# EAGLE board roland_121_vcf (EAGLE 7.1.0)

Size 100 x 80 mm. Coordinates in mm from the lower left corner, seen from the top.
Outline: 0,0 100,0 100,80 0,80 0,0
Copper layers (1*16): Top 0.035mm / dielectric 1.5mm / Bottom 0.035mm
Design rules "default *": minimum track width 24mil, minimum drill 24mil, track to track 14mil, track to pad 14mil, pad to pad 14mil, via to via 14mil, smd to smd 8mil, copper to edge 0mil, drill to drill 8mil, minimum pad ring 10mil, minimum via ring 8mil, stop-mask expansion 4mil, vias tented up to drill 0mil, thermal gap 10mil

## Footprints (pad centres in the part's own frame; a part is rotated, then mirrored left to right if it is on the bottom)
LSP10 = drill 1.016 pad 2.159 octagon: MP 0,0
B45181A = drill 0.813 pad 1.6: + -1.27,0 | drill 0.813 pad 1.6 octagon: - 1.27,0
C025-030X050 = drill 0.813 octagon: 1 -1.27,0; 2 1.27,0
3RP/1610N = drill 1.2 pad 2.184: 1 -5,0; 2 0,0; 3 5,0
DO35-7 = drill 0.813 long: A 3.81,0; C -3.81,0
RTRIM64W = drill 0.61: 1 1.27,-2.54; 2 1.27,0; 3 1.27,2.54
DIL08 = drill 0.813 pad 1.27: 1 -3.81,-3.81; 2 -1.27,-3.81; 3 1.27,-3.81; 4 3.81,-3.81; 5 3.81,3.81; 6 1.27,3.81; 7 -1.27,3.81; 8 -3.81,3.81
DIL16 = drill 0.813 long: 1 -8.89,-3.81; 2 -6.35,-3.81; 3 -3.81,-3.81; 4 -1.27,-3.81; 5 1.27,-3.81; 6 3.81,-3.81; 7 6.35,-3.81; 8 8.89,-3.81; 9 8.89,3.81; 10 6.35,3.81; 11 3.81,3.81; 12 1.27,3.81; 13 -1.27,3.81; 14 -3.81,3.81; 15 -6.35,3.81; 16 -8.89,3.81
TO92F = drill 0.813 octagon: 1 -1.27,0; 2 0,1.905; 3 1.27,0
TO92 = drill 0.813 octagon: 1 1.27,0; 2 0,1.905; 3 -1.27,0
0207/7 = drill 0.813 octagon: 1 -3.81,0; 2 3.81,0
POWER_16 = drill 1.016 pad 1.88 octagon: 1 -6.35,-1.27; 2 -6.35,1.27; 3 -3.81,-1.27; 4 -3.81,1.27; 5 -1.27,-1.27; 6 -1.27,1.27; 7 1.27,-1.27; 8 1.27,1.27; 9 3.81,-1.27; 10 3.81,1.27; 11 6.35,-1.27; 12 6.35,1.27; 13 8.89,-1.27; 14 8.89,1.27; 15 11.43,-1.27; 16 11.43,1.27

## Placement (x,y rotation side)
12DB_OUT  LSP10  [LSP10]  68.58,60.96 0 top
24DB_OUT  LSP10  [LSP10]  67.31,66.04 0 top
C1  22uF  [B45181A]  7.62,29.21 90 top
C2  22uF  [B45181A]  7.62,35.56 270 top
C3  0.1uF  [C025-030X050]  21.59,24.13 0 top
C4  0.1uF  [C025-030X050]  19.05,41.91 0 top
C5  0.1uF  [C025-030X050]  55.88,36.83 270 top
C6  0.1uF  [C025-030X050]  74.93,55.88 0 top
C7  0.1uF  [C025-030X050]  52.07,36.83 270 top
C8  0.1uF  [C025-030X050]  82.55,48.26 270 top
C9  470p  [C025-030X050]  33.02,38.1 0 top
C10  470p  [C025-030X050]  54.61,46.99 0 top
C11  22uF  [B45181A]  49.53,68.58 0 top
C12  22uF  [B45181A]  54.61,68.58 180 top
C13  22uF  [B45181A]  78.74,60.96 180 top
C14  22uF  [B45181A]  73.66,60.96 0 top
C15  470p  [C025-030X050]  83.82,43.18 0 top
C16  470p  [C025-030X050]  64.77,35.56 0 top
C17  22uF  [B45181A]  52.07,73.66 180 top
C18  22uF  [B45181A]  46.99,73.66 0 top
C19  22uF  [B45181A]  62.23,60.96 90 top
C20  22uF  [B45181A]  62.23,66.04 270 top
CUTOFF  100k  [3RP/1610N]  74.93,2.54 0 top
CV1  LSP10  [LSP10]  46.99,8.89 0 top
CV1_LEVEL  100k  [3RP/1610N]  41.91,2.54 0 top
CV1_NORM  LSP10  [LSP10]  19.05,53.34 0 top
CV2  LSP10  [LSP10]  63.5,8.89 0 top
CV2_LEVEL  100k  [3RP/1610N]  58.42,2.54 0 top
D1  1N4148DO35-7  [DO35-7]  30.48,67.31 270 top
D2  1N4148DO35-7  [DO35-7]  33.02,67.31 90 top
FREQ_TRIM  100k  [RTRIM64W]  63.5,24.13 180 top
IC1  TL072P  [DIL08]  19.05,33.02 90 top
IC2  LM13700N  [DIL16]  43.18,43.18 270 top
IC3  LM13700N  [DIL16]  74.93,43.18 90 top
IN1  LSP10  [LSP10]  13.97,8.89 0 top
IN1_LEVEL  100k  [3RP/1610N]  8.89,2.54 0 top
IN2  LSP10  [LSP10]  30.48,8.89 0 top
IN2_LEVEL  100k  [3RP/1610N]  25.4,2.54 0 top
Q1  MPF102  [TO92F]  33.02,41.91 0 top
Q2  2N3904  [TO92]  48.26,24.13 180 top
Q3  2N3906  [TO92]  31.75,55.88 0 top
Q4  MPF102  [TO92F]  62.23,49.53 180 top
Q5  2N3904  [TO92]  69.85,72.39 180 top
Q6  MPF102  [TO92F]  54.61,41.91 0 top
Q7  MPF102  [TO92F]  63.5,43.18 270 top
Q8  2N3904  [TO92]  63.5,54.61 270 top
R5  100k  [0207/7]  25.4,10.16 270 top
R8  100k  [0207/7]  8.89,10.16 90 top
R9  150k  [0207/7]  74.93,10.16 270 top
R10  100k  [0207/7]  41.91,10.16 270 top
R11  100k  [0207/7]  58.42,10.16 270 top
R12  1M  [0207/7]  58.42,20.32 90 top
R13  290k  [0207/7]  54.61,20.32 90 top
R14  33k  [0207/7]  30.48,33.02 0 top
R15  10k  [0207/7]  12.7,41.91 90 top
R16  15k  [0207/7]  12.7,31.75 90 top
R17  27k  [0207/7]  30.48,29.21 0 top
R19  33k  [0207/7]  30.48,25.4 180 top
R20  560  [0207/7]  31.75,20.32 180 top
R21  10k  [0207/7]  12.7,17.78 180 top
R22  560  [0207/7]  39.37,26.67 90 top
R23  1k8  [0207/7]  22.86,17.78 180 top
R24  5k6  [0207/7]  12.7,15.24 0 top
R25  10k  [0207/7]  34.29,17.78 180 top
R26  68k  [0207/7]  33.02,45.72 0 top
R27  15k  [0207/7]  33.02,52.07 0 top
R28  1k5  [0207/7]  44.45,19.05 180 top
R29  22k  [0207/7]  25.4,45.72 90 top
R30  100k  [0207/7]  54.61,27.94 0 top
R31  68k  [0207/7]  25.4,55.88 270 top
R32  560  [0207/7]  31.75,59.69 180 top
R33  560  [0207/7]  50.8,50.8 270 top
R34  6k8  [0207/7]  91.44,10.16 270 top
R35  68k  [0207/7]  50.8,59.69 180 top
R36  15k  [0207/7]  43.18,60.96 90 top
R37  10k  [0207/7]  88.9,22.86 180 top
R38  22k  [0207/7]  41.91,71.12 90 top
R39  68k  [0207/7]  31.75,74.93 0 top
R40  560  [0207/7]  43.18,26.67 90 top
R42  100  [0207/7]  86.36,10.16 90 top
R43  560  [0207/7]  86.36,39.37 180 top
R44  470k  [0207/7]  57.15,57.15 90 top
R45  47k  [0207/7]  52.07,63.5 180 top
R46  12k  [0207/7]  83.82,60.96 90 top
R47  4k7  [0207/7]  60.96,73.66 180 top
R48  10k  [0207/7]  96.52,10.16 90 top
R49  68k  [0207/7]  74.93,30.48 0 top
R50  15k  [0207/7]  86.36,34.29 180 top
R51  22k  [0207/7]  68.58,27.94 90 top
R52  68k  [0207/7]  63.5,39.37 180 top
R53  560  [0207/7]  74.93,27.94 180 top
R54  560  [0207/7]  74.93,25.4 180 top
R55  68k  [0207/7]  73.66,17.78 180 top
R56  15k  [0207/7]  86.36,31.75 180 top
R57  22k  [0207/7]  86.36,60.96 270 top
R58  10k  [0207/7]  74.93,20.32 0 top
RESONANCE  100k  [3RP/1610N]  91.44,2.54 0 top
U1  POWER  [POWER_16]  11.43,62.23 270 top
WIDTH  10k  [RTRIM64W]  12.7,22.86 90 top

## Library data of the parts
12DB_OUT 24DB_OUT CV1 CV1_NORM CV2 IN1 IN2 = solpad
C1-C20 FREQ_TRIM R5 R8-R17 R19-R40 R42-R58 WIDTH = rcl
CUTOFF CV1_LEVEL CV2_LEVEL IN1_LEVEL IN2_LEVEL RESONANCE = pot
D1 D2 = diode
IC1 = linear
IC2 IC3 = synthdiy updated imperial
Q1 Q4 Q6 Q7 = mes_transistors
Q2 Q5 Q8 = transistor-npn
Q3 = transistor-pnp
U1 = eurorack

## Nets
+12V: C3.1 C5.1 C7.1 CUTOFF.3 FREQ_TRIM.3 IC1.8 IC2.11 IC3.11 Q1.1 Q2.1 Q4.1 Q6.1 Q7.1 Q8.1 R44.1 R46.1 U1.9 U1.10
-12V: C4.2 C6.2 C8.2 FREQ_TRIM.1 IC1.4 IC2.6 IC3.6 R13.2 R29.1 R30.2 R38.1 R45.2 R47.2 R51.1 R57.1 R58.1 U1.1 U1.2
GND: C3.2 C4.1 C5.2 C6.1 C7.2 C8.1 C9.2 C10.2 C15.2 C16.2 CUTOFF.1 CV1_LEVEL.1 CV2_LEVEL.1 D1.A D2.C IC2.7 IC2.10 IC3.7 IC3.10 IN1_LEVEL.1 IN2_LEVEL.1 Q3.3 R14.2 R15.2 R20.1 R22.1 R28.2 R32.1 R33.1 R37.2 R40.1 R42.2 R43.1 R53.1 R54.1 U1.3 U1.4 U1.5 U1.6 U1.7 U1.8
N$1: IC2.1 R27.2
N$2: IC2.16 R36.2
N$3: IC2.13 R31.1 R32.2 R35.2
N$4: IC2.14 R33.2
N$5: IN2_LEVEL.2 R5.2
N$6: C1.+ R5.1 R8.2
N$7: C2.+ IC1.2 R17.2
N$8: IC1.1 R17.1 R19.2
N$9: R16.1 WIDTH.3
N$10: CV2_LEVEL.2 R11.2
N$11: IC1.3 R14.1
N$12: IC1.5 R15.1
N$13: IC1.7 R21.2 WIDTH.1 WIDTH.2
N$14: IC3.1 R50.2
N$15: IC3.4 R39.1 R40.2 R49.2
N$16: IC1.6 R9.1 R10.1 R11.1 R12.1 R13.1 R16.2
N$17: FREQ_TRIM.2 R12.2
N$18: R23.1 R25.2
N$19: R21.1 R23.2 R24.2
N$20: Q2.2 R24.1 R25.1 R28.1
N$21: Q2.3 Q3.2 R30.1
N$22: IC2.4 R19.1 R20.2 R26.2
N$23: IC2.3 R22.2 R34.1
N$24: IC3.3 R43.2
N$25: IC3.16 R56.2
N$26: IC3.13 R52.1 R53.2 R55.2
N$27: IC3.14 R54.2
N$28: Q1.2 R26.1 R29.2 R31.2
N$29: 24DB_OUT.MP C20.+
N$30: 12DB_OUT.MP C14.+
N$31: Q5.3 R47.1
N$32: C13.+ Q5.1 R46.2
N$33: C12.+ Q5.2 R44.2 R45.1
N$34: IN2.MP IN2_LEVEL.3
N$36: C19.- C20.-
N$37: C13.- C14.-
N$38: C11.- C12.-
N$39: C1.- C2.-
N$40: C9.1 IC2.5 Q1.3
N$41: C10.1 IC2.12 Q4.3
N$42: C15.1 IC3.5 Q6.3
N$43: C16.1 IC3.12 Q7.3
N$44: Q6.2 R49.1 R51.2 R52.2
N$45: Q3.1 R27.1 R36.1 R50.1 R56.1
N$46: C11.+ Q4.2 R35.1 R38.2 R39.2
N$47: Q7.2 Q8.2 R57.2
N$48: R42.1 RESONANCE.1
N$49: C17.- C18.-
N$50: C18.+ R48.2
N$51: R48.1 RESONANCE.3
N$52: D1.C D2.A R34.2 R37.1 RESONANCE.2
N$53: CV1_LEVEL.2 R10.2
N$54: CV2.MP CV2_LEVEL.3
N$55: CV1_NORM.MP U1.13 U1.14
N$56: CUTOFF.2 R9.2
N$57: IN1_LEVEL.2 R8.1
N$58: IN1.MP IN1_LEVEL.3
N$59: CV1.MP CV1_LEVEL.3
N$60: C17.+ C19.+ Q8.3 R55.1 R58.2

## Tracks (layer width: path | path; a pad name or v marks a point on that pad's centre or on a via)
+12V  (17 unrouted)
-12V  (17 unrouted)
GND  (40 unrouted)
N$1  (1 unrouted)
N$2  (1 unrouted)
N$3  (3 unrouted)
N$4  (1 unrouted)
N$5  (1 unrouted)
N$6  (2 unrouted)
N$7  (2 unrouted)
N$8  (2 unrouted)
N$9  (1 unrouted)
N$10  (1 unrouted)
N$11  (1 unrouted)
N$12  (1 unrouted)
N$13  (3 unrouted)
N$14  (1 unrouted)
N$15  (3 unrouted)
N$16  (6 unrouted)
N$17  (1 unrouted)
N$18  (1 unrouted)
N$19  (2 unrouted)
N$20  (3 unrouted)
N$21  (2 unrouted)
N$22  (3 unrouted)
N$23  (2 unrouted)
N$24  (1 unrouted)
N$25  (1 unrouted)
N$26  (3 unrouted)
N$27  (1 unrouted)
N$28  (3 unrouted)
N$29  (1 unrouted)
N$30  (1 unrouted)
N$31  (1 unrouted)
N$32  (2 unrouted)
N$33  (3 unrouted)
N$34  (1 unrouted)
N$36  (1 unrouted)
N$37  (1 unrouted)
N$38  (1 unrouted)
N$39  (1 unrouted)
N$40  (2 unrouted)
N$41  (2 unrouted)
N$42  (2 unrouted)
N$43  (2 unrouted)
N$44  (3 unrouted)
N$45  (4 unrouted)
N$46  (4 unrouted)
N$47  (2 unrouted)
N$48  (1 unrouted)
N$49  (1 unrouted)
N$50  (1 unrouted)
N$51  (1 unrouted)
N$52  (4 unrouted)
N$53  (1 unrouted)
N$54  (1 unrouted)
N$55  (2 unrouted)
N$56  (1 unrouted)
N$57  (1 unrouted)
N$58  (1 unrouted)
N$59  (1 unrouted)
N$60  (4 unrouted)